# Altium PCB High_Power_Board_v2.PcbDoc (part 2 of 3)
Units mm, origin at the board's own origin, x right, y up, seen from the top; angles counter-clockwise.
Board outline 370 x 200 mm, 2 copper layers (Top Layer, Bottom Layer); 309 components, 248 nets, 1084 pads, 8 vias.
Unrouted connection lines stored in the file: 720.
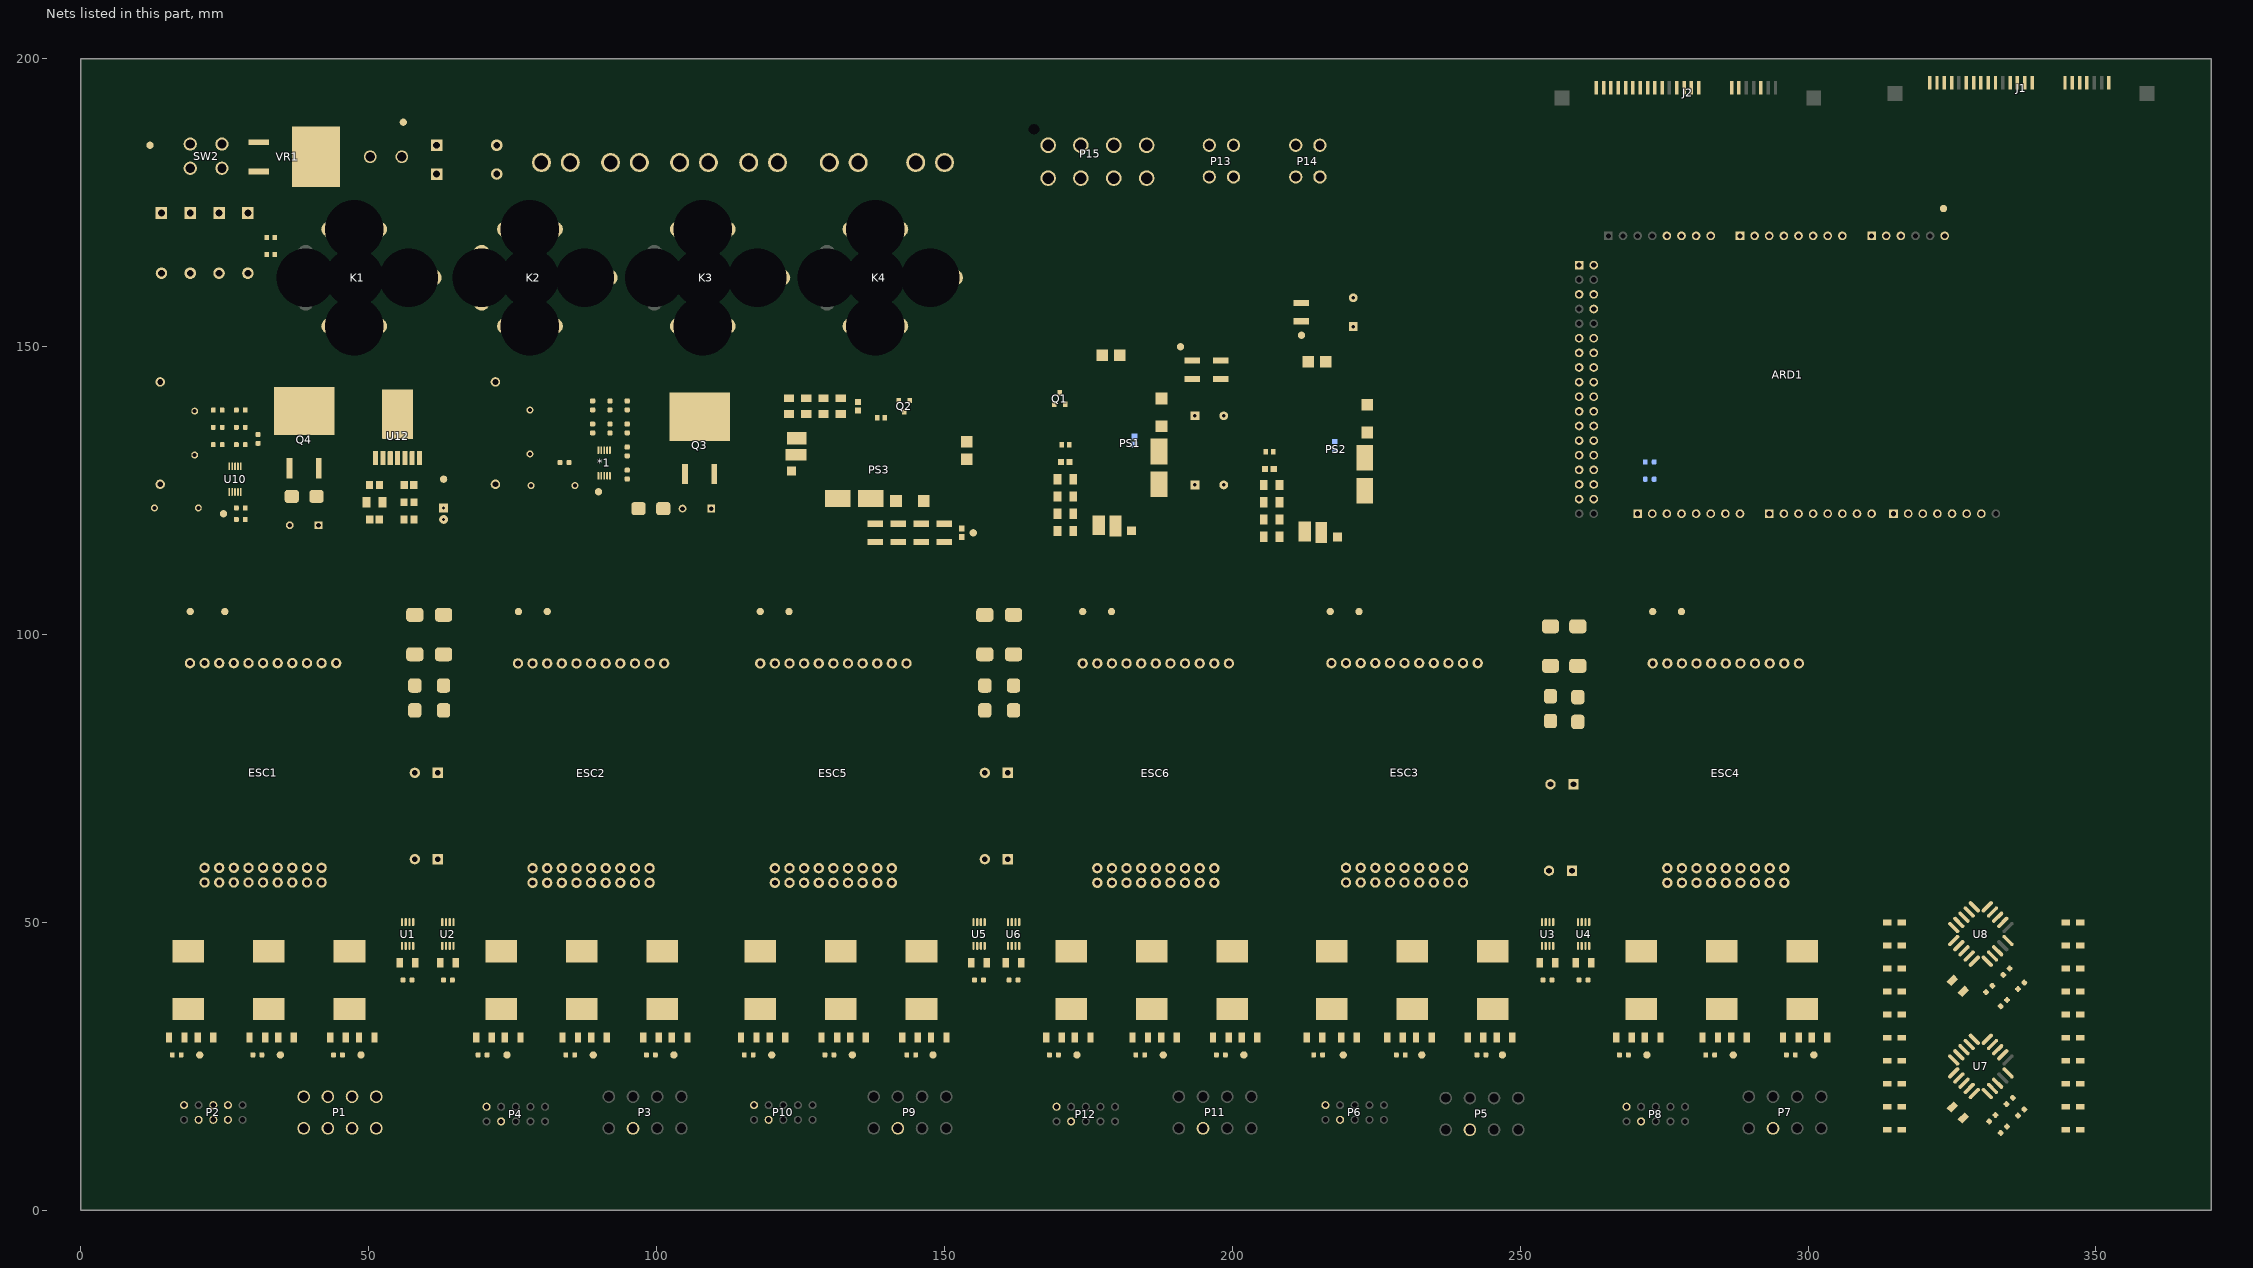
[diagram p2: the nets of this part, all layers, seen from the top]

## Part data
1 2: "Zener Diode", LatestRevisionDate=17-Jul-2002, LatestRevisionNote="Re-released for DXP Platform.", PackageDescription="Diode, Thru-Hole; 2 Leads; 0.7 in Pin Spacing", PackageReference=DIODE-0.7, Published=8-Jun-2000, Publisher="Altium Limited"
*1: "Hot Swap Controller 1-CH 80V N-Channel Positive High Voltage 10-Pin VSSOP T/R", Case/Package=MSOP, Manufacturer 1="TI National Semiconductor", Max Operating Temperature=125°C, Max Supply Voltage=80V, Min Operating Temperature=-40°C, Min Supply Voltage=9V, Output Voltage=12V, Package Quantity=1000, Supplier Part Number 1=LM5069MM-2/NOPBCT-ND, ComponentLink1Description=https://datasheet.ciiva.com/15099/getdatasheetpartid-628880-15099677.pdf?src-supplier=Verical, ComponentLink1URL=https://datasheet.ciiva.com/15099/getdatasheetpartid-628880-15099677.pdf?src-supplier=Verical, ComponentLink2Description=https://datasheet.ciiva.com/3222/lm5069-3222438.pdf?src-supplier=Avnet, ComponentLink2URL=https://datasheet.ciiva.com/3222/lm5069-3222438.pdf?src-supplier=Avnet, ComponentLink3Description=https://datasheet.ciiva.com/3222/lm5069-3222470.pdf?src-supplier=Avnet, ComponentLink3URL=https://datasheet.ciiva.com/3222/lm5069-3222470.pdf?src-supplier=Avnet, ComponentLink4Description=https://datasheet.ciiva.com/6609/lm5069-6609670.pdf?src-supplier=Digi-Key, ComponentLink4URL=https://datasheet.ciiva.com/6609/lm5069-6609670.pdf?src-supplier=Digi-Key, ComponentLink5Description=https://datasheet.ciiva.com/1511/1642228-1511437.pdf?src-supplier=Element14, ComponentLink5URL=https://datasheet.ciiva.com/1511/1642228-1511437.pdf?src-supplier=Element14, Depth=3.1mm, Height=0.86mm, Lead Free="Lead Free", Length=3mm, Manufacturer Part Number 1=LM5069MM-2/NOPB, Mount="Surface Mount", Number of Channels=1, Number of Outputs=1, Number of Pins=10, Packaging="Tape and Reel", Pricing 1="1=3.00000, 10=2.69700, 25=2.54920, 100=2.09610, 250=1.88080, 500=1.81280 (USD)", Radiation Hardening=No, REACH SVHC="No SVHC", RoHS=Yes, Stock 1=115715, Supplier 1=Digi-Key, Width=3mm
B1 D1 D2 D3 D4 D5 D6: "TVS Diode", Code_JEDEC=DO-214-AB, LatestRevisionDate=17-Jul-2002, LatestRevisionNote="Re-released for DXP Platform.", PackageDescription="DO-214-AB/SMC; 2 C-Bend Leads; Body 7.9 x 5.9 mm, inc. leads (LxW)", PackageReference=SMC, PackageVersion=Sep-1996, Published=8-Jun-2000, Publisher="Altium Limited"
B2: library part "D Zener", "Zener Diode", Code_JEDEC=DO-214-AB, LatestRevisionDate=17-Jul-2002, LatestRevisionNote="Re-released for DXP Platform.", PackageDescription="DO-214-AB/SMC; 2 C-Bend Leads; Body 7.9 x 5.9 mm, inc. leads (LxW)", PackageReference=SMC, PackageVersion=Sep-1996, Published=8-Jun-2000, Publisher="Altium Limited"
C1 C9 C17 C25 C33 C41: "Polarized Capacitor (Radial)"
C2 C3 C4 C5 C6 C7 C8 C10 C11 C12 C13 C14 C15 C16 C18 C19 C20 C21 C22 C23 C24 C26 C27 C28 C29 C30 C31 C32 C34 C35 C36 C37 C38 C39 C40 C42 C43 C44 C45 C46 C47 C48 C49 C50: "Capacitor (Semiconductor SIM Model)", LatestRevisionDate=29-May-2009, LatestRevisionNote="IPC-7351 Footprint Added.", PackageDescription="Chip Capacitor", PackageReference=C1206, Published=8-Jun-2000, Publisher="Altium Limited"
C51 C52 C83 C84 C85 C86: "Capacitor", Publisher="Altium Limited"
  C51 C52 C84 C86: LatestRevisionDate=17-Jul-2002, LatestRevisionNote="Re-released for DXP Platform.", PackageDescription="Radial Cap, Thru-Hole; 2 Leads; 0.3 in Pin Spacing", PackageReference=RAD-0.3, Published=8-Jun-2000
  C83 C85: PackageDescription="Capacitor; 2 Leads", PackageReference=CAPR5-4X5, Published=23-Sep-2002
C53 C54 C62: library part 35ZLH330MEFCT810X12.5, "CAP ALUM 330UF 20% 35V RADIAL", Case/Package=Radial, Manufacturer 1=Rubycon, Max Operating Temperature=105°C, Min Operating Temperature=-40°C, Package Quantity=1000, Ripple Current=731.5mA, Supplier Part Number 1=1189-3752-1-ND, Tolerance=20%, Voltage Rating=35V, Capacitance=330uF, ComponentLink1Description=http://www.rubycon.co.jp/en/catalog/e_pdfs/aluminum/e_ZLH.pdf?src-supplier=Digi-Key, ComponentLink1URL=http://www.rubycon.co.jp/en/catalog/e_pdfs/aluminum/e_ZLH.pdf?src-supplier=Digi-Key, ComponentLink2Description=http://www.rubycon.co.jp/en/catalog/e_pdfs/aluminum/Radial_Lead_Alumi_Eng.pdf?src-supplier=Digi-Key, ComponentLink2URL=http://www.rubycon.co.jp/en/catalog/e_pdfs/aluminum/Radial_Lead_Alumi_Eng.pdf?src-supplier=Digi-Key, Height - Seated (Max)=0.551inch, Impedance=39mR, Lead Pitch=0.197inch, Life (Hours)=10000Hour, Manufacturer Part Number 1=35ZLH330MEFCT810X12.5, Mount="Through Hole", Packaging="Tape and Reel", Pricing 1="1=0,52000, 10=0,36900, 100=0,24280 (USD)", RoHS=Yes, Stock 1=14330, Supplier 1=Digi-Key
C55 C56 C63: library part GRM32ER71E226KE15L, "Cap Ceramic 22uF 25V X7R 10% SMD 1210 125C Embossed T/R", Case Code (Imperial)=1210, Case Code (Metric)=3225, Dielectric=X7R, Manufacturer 1=Murata, Max Operating Temperature=125°C, Min Operating Temperature=-55°C, Package Quantity=1, Supplier Part Number 1=490-5313-6-ND, Tolerance=10%, Voltage=25V, Capacitance=22uF, Case/Package=1210, Category=Capacitor, ComponentLink1Description=https://datasheet.ciiva.com/6072/1697714-6072768.pdf?src-supplier=Farnell, ComponentLink1URL=https://datasheet.ciiva.com/6072/1697714-6072768.pdf?src-supplier=Farnell, ComponentLink2Description=https://datasheet.ciiva.com/16497/product-16497009.pdf?src-supplier=Future+Electronics, ComponentLink2URL=https://datasheet.ciiva.com/16497/product-16497009.pdf?src-supplier=Future+Electronics, ComponentLink3Description=https://datasheet.ciiva.com/3776/2741grm32er71e226ke1523-3776996.pdf?src-supplier=Arrow, ComponentLink3URL=https://datasheet.ciiva.com/3776/2741grm32er71e226ke1523-3776996.pdf?src-supplier=Arrow, ComponentLink4Description=https://datasheet.ciiva.com/11789/0900766b80ef921d-11789129.pdf?src-supplier=RSComponents, ComponentLink4URL=https://datasheet.ciiva.com/11789/0900766b80ef921d-11789129.pdf?src-supplier=RSComponents, ComponentLink5Description=https://datasheet.ciiva.com/29201/451826-da-01-de-vs-kondens-grm32-er71e-226ke15l-29201795.pdf?src-supplier=Conrad, ComponentLink5URL=https://datasheet.ciiva.com/29201/451826-da-01-de-vs-kondens-grm32-er71e-226ke15l-29201795.pdf?src-supplier=Conrad, ComponentLink6Description=https://datasheet.ciiva.com/175/partnumbering-e-01-175746.pdf?src-supplier=Digi-Key, ComponentLink6URL=https://datasheet.ciiva.com/175/partnumbering-e-01-175746.pdf?src-supplier=Digi-Key, ComponentLink7Description=https://datasheet.ciiva.com/175/partnumbering-e-01-175747.pdf?src-supplier=Digi-Key, ComponentLink7URL=https://datasheet.ciiva.com/175/partnumbering-e-01-175747.pdf?src-supplier=Digi-Key, ComponentLink8Description=https://datasheet.ciiva.com/175/partnumbering-e-01-175748.pdf?src-supplier=Digi-Key, ComponentLink8URL=https://datasheet.ciiva.com/175/partnumbering-e-01-175748.pdf?src-supplier=Digi-Key, ComponentLink9Description=https://datasheet.ciiva.com/22703/1697714-22703397.pdf?src-supplier=Element14, ComponentLink9URL=https://datasheet.ciiva.com/22703/1697714-22703397.pdf?src-supplier=Element14, Depth=2.5mm, Height=2.5mm, Lead Free="Lead Free", Length=3.2mm, Manufacturer Part Number 1=GRM32ER71E226KE15L, Material=Ceramic, Mount="Surface Mount", Number of Pins=2, Packaging="Tape and Reel", Pricing 1="1=1,78000, 10=1,40600, 100=1,05410, 500=0,79646 (USD)", Radiation Hardening=No, REACH SVHC="No SVHC", RoHS=Yes, Stock 1=52660, Supplier 1=Digi-Key, Termination=SMD/SMT, Thickness=0.106inch, Voltage Rating=25V, Voltage Rating (DC)=25V, Width=0.098inch
C57 C58 C59 C60 C64 C65 C66 C67 C74 C76 C82: library part GRT31CR61H106ME01L, "CAP CER 10UF 50V X5R 1206", Capacitance=10uF, Case Code (Imperial)=1206, Case Code (Metric)=3216, Manufacturer 1=Murata, Max Operating Temperature=85°C, Min Operating Temperature=-55°C, Ratings=AEC-Q200, Supplier Part Number 1=490-12457-1-ND, Tolerance=20%, Voltage Rating=50V, Case/Package=1206, Category=Capacitor, ComponentLink1Description=http://search.murata.co.jp/Ceramy/image/img/A01X/G101/ENG/GRT31CR61H106ME01-01.pdf?src-supplier=Digi-Key, ComponentLink1URL=http://search.murata.co.jp/Ceramy/image/img/A01X/G101/ENG/GRT31CR61H106ME01-01.pdf?src-supplier=Digi-Key, Length=0.126inch, Manufacturer Part Number 1=GRT31CR61H106ME01L, Mount="Surface Mount", Packaging="Tape and Reel", Pricing 1="1=0,50000, 10=0,34900, 100=0,20920, 500=0,15690, 1000=0,13249 (USD)", RoHS=Yes, Stock 1=8159, Supplier 1=Digi-Key, Thickness=0.071inch, Width=0.063inch
C61 C68 C77 C78: library part C0603C103KARACAUTO, "Cap Ceramic 0.01uF 250V X7R 10% Pad SMD 0603 125C Automotive T/R", Capacitance=10nF, Case Code (Imperial)=0603, Case Code (Metric)=1608, Manufacturer 1=KEMET, Max Operating Temperature=125°C, Min Operating Temperature=-55°C, Ratings=AEC-Q200, Supplier Part Number 1=399-17960-1-ND, Tolerance=10%, Voltage Rating=250V, Case/Package=0603, Category=Capacitor, ComponentLink1Description=https://api.kemet.com/component-edge/download/datasheet/C0603C103KARACAUTO.pdf?src-supplier=Digi-Key, ComponentLink1URL=https://api.kemet.com/component-edge/download/datasheet/C0603C103KARACAUTO.pdf?src-supplier=Digi-Key, Manufacturer Part Number 1=C0603C103KARACAUTO, Mount="Surface Mount", Packaging="Tape and Reel", Pricing 1="1=0,90000, 10=0,68500, 100=0,49040, 500=0,37964, 1000=0,32691 (USD)", RoHS=No, Stock 1=8483, Supplier 1=Digi-Key
C69 C70: library part "Wurth 860010372006", "Polarized Capacitor (Radial)", Case Code (Imperial)=1210, Case Code (Metric)=3225, Dielectric=X7R, Manufacturer 1=Murata, Manufacturer Part Number 1=GRM32ER71E226KE15L, Max Operating Temperature=125°C, Min Operating Temperature=-55°C, Package Quantity=1, Supplier Part Number 1=490-5313-6-ND, Tolerance=10%, Voltage=25V, Capacitance=22uF, Case/Package=1210, Category=Capacitor, ComponentLink1Description=https://datasheet.ciiva.com/6072/1697714-6072768.pdf?src-supplier=Farnell, ComponentLink1URL=https://datasheet.ciiva.com/6072/1697714-6072768.pdf?src-supplier=Farnell, ComponentLink2Description=https://datasheet.ciiva.com/16497/product-16497009.pdf?src-supplier=Future+Electronics, ComponentLink2URL=https://datasheet.ciiva.com/16497/product-16497009.pdf?src-supplier=Future+Electronics, ComponentLink3Description=https://datasheet.ciiva.com/3776/2741grm32er71e226ke1523-3776996.pdf?src-supplier=Arrow, ComponentLink3URL=https://datasheet.ciiva.com/3776/2741grm32er71e226ke1523-3776996.pdf?src-supplier=Arrow, ComponentLink4Description=https://datasheet.ciiva.com/11789/0900766b80ef921d-11789129.pdf?src-supplier=RSComponents, ComponentLink4URL=https://datasheet.ciiva.com/11789/0900766b80ef921d-11789129.pdf?src-supplier=RSComponents, ComponentLink5Description=https://datasheet.ciiva.com/29201/451826-da-01-de-vs-kondens-grm32-er71e-226ke15l-29201795.pdf?src-supplier=Conrad, ComponentLink5URL=https://datasheet.ciiva.com/29201/451826-da-01-de-vs-kondens-grm32-er71e-226ke15l-29201795.pdf?src-supplier=Conrad, ComponentLink6Description=https://datasheet.ciiva.com/175/partnumbering-e-01-175746.pdf?src-supplier=Digi-Key, ComponentLink6URL=https://datasheet.ciiva.com/175/partnumbering-e-01-175746.pdf?src-supplier=Digi-Key, ComponentLink7Description=https://datasheet.ciiva.com/175/partnumbering-e-01-175747.pdf?src-supplier=Digi-Key, ComponentLink7URL=https://datasheet.ciiva.com/175/partnumbering-e-01-175747.pdf?src-supplier=Digi-Key, ComponentLink8Description=https://datasheet.ciiva.com/175/partnumbering-e-01-175748.pdf?src-supplier=Digi-Key, ComponentLink8URL=https://datasheet.ciiva.com/175/partnumbering-e-01-175748.pdf?src-supplier=Digi-Key, ComponentLink9Description=https://datasheet.ciiva.com/22703/1697714-22703397.pdf?src-supplier=Element14, ComponentLink9URL=https://datasheet.ciiva.com/22703/1697714-22703397.pdf?src-supplier=Element14, Depth=2.5mm, Height=2.5mm, Lead Free="Lead Free", Length=3.2mm, Material=Ceramic, Mount="Surface Mount", Number of Pins=2, Packaging="Tape and Reel", Pricing 1="1=1,78000, 10=1,40600, 100=1,05410, 500=0,79646 (USD)", Radiation Hardening=No, REACH SVHC="No SVHC", RoHS=Yes, Stock 1=52660, Supplier 1=Digi-Key, Termination=SMD/SMT, Thickness=0.106inch, Voltage Rating=25V, Voltage Rating (DC)=25V, Width=0.098inch
C71: library part Cap2, "Capacitor", Case Code (Imperial)=1210, Case Code (Metric)=3225, Dielectric=X7R, Manufacturer 1=Murata, Manufacturer Part Number 1=GRM32ER71E226KE15L, Max Operating Temperature=125°C, Min Operating Temperature=-55°C, Package Quantity=1, Supplier Part Number 1=490-5313-6-ND, Tolerance=10%, Voltage=25V, Capacitance=22uF, Case/Package=1210, Category=Capacitor, ComponentLink1Description=https://datasheet.ciiva.com/6072/1697714-6072768.pdf?src-supplier=Farnell, ComponentLink1URL=https://datasheet.ciiva.com/6072/1697714-6072768.pdf?src-supplier=Farnell, ComponentLink2Description=https://datasheet.ciiva.com/16497/product-16497009.pdf?src-supplier=Future+Electronics, ComponentLink2URL=https://datasheet.ciiva.com/16497/product-16497009.pdf?src-supplier=Future+Electronics, ComponentLink3Description=https://datasheet.ciiva.com/3776/2741grm32er71e226ke1523-3776996.pdf?src-supplier=Arrow, ComponentLink3URL=https://datasheet.ciiva.com/3776/2741grm32er71e226ke1523-3776996.pdf?src-supplier=Arrow, ComponentLink4Description=https://datasheet.ciiva.com/11789/0900766b80ef921d-11789129.pdf?src-supplier=RSComponents, ComponentLink4URL=https://datasheet.ciiva.com/11789/0900766b80ef921d-11789129.pdf?src-supplier=RSComponents, ComponentLink5Description=https://datasheet.ciiva.com/29201/451826-da-01-de-vs-kondens-grm32-er71e-226ke15l-29201795.pdf?src-supplier=Conrad, ComponentLink5URL=https://datasheet.ciiva.com/29201/451826-da-01-de-vs-kondens-grm32-er71e-226ke15l-29201795.pdf?src-supplier=Conrad, ComponentLink6Description=https://datasheet.ciiva.com/175/partnumbering-e-01-175746.pdf?src-supplier=Digi-Key, ComponentLink6URL=https://datasheet.ciiva.com/175/partnumbering-e-01-175746.pdf?src-supplier=Digi-Key, ComponentLink7Description=https://datasheet.ciiva.com/175/partnumbering-e-01-175747.pdf?src-supplier=Digi-Key, ComponentLink7URL=https://datasheet.ciiva.com/175/partnumbering-e-01-175747.pdf?src-supplier=Digi-Key, ComponentLink8Description=https://datasheet.ciiva.com/175/partnumbering-e-01-175748.pdf?src-supplier=Digi-Key, ComponentLink8URL=https://datasheet.ciiva.com/175/partnumbering-e-01-175748.pdf?src-supplier=Digi-Key, ComponentLink9Description=https://datasheet.ciiva.com/22703/1697714-22703397.pdf?src-supplier=Element14, ComponentLink9URL=https://datasheet.ciiva.com/22703/1697714-22703397.pdf?src-supplier=Element14, Depth=2.5mm, Height=2.5mm, Lead Free="Lead Free", Length=3.2mm, Material=Ceramic, Mount="Surface Mount", Number of Pins=2, Packaging="Tape and Reel", Pricing 1="1=1,78000, 10=1,40600, 100=1,05410, 500=0,79646 (USD)", Radiation Hardening=No, REACH SVHC="No SVHC", RoHS=Yes, Stock 1=52660, Supplier 1=Digi-Key, Termination=SMD/SMT, Thickness=0.106inch, Voltage Rating=25V, Voltage Rating (DC)=25V, Width=0.098inch
C72: library part Cap, "Capacitor", Case Code (Imperial)=1210, Case Code (Metric)=3225, Dielectric=X7R, Manufacturer 1=Murata, Manufacturer Part Number 1=GRM32ER71E226KE15L, Max Operating Temperature=125°C, Min Operating Temperature=-55°C, Package Quantity=1, Supplier Part Number 1=490-5313-6-ND, Tolerance=10%, Voltage=25V, Capacitance=22uF, Case/Package=1210, Category=Capacitor, ComponentLink1Description=https://datasheet.ciiva.com/6072/1697714-6072768.pdf?src-supplier=Farnell, ComponentLink1URL=https://datasheet.ciiva.com/6072/1697714-6072768.pdf?src-supplier=Farnell, ComponentLink2Description=https://datasheet.ciiva.com/16497/product-16497009.pdf?src-supplier=Future+Electronics, ComponentLink2URL=https://datasheet.ciiva.com/16497/product-16497009.pdf?src-supplier=Future+Electronics, ComponentLink3Description=https://datasheet.ciiva.com/3776/2741grm32er71e226ke1523-3776996.pdf?src-supplier=Arrow, ComponentLink3URL=https://datasheet.ciiva.com/3776/2741grm32er71e226ke1523-3776996.pdf?src-supplier=Arrow, ComponentLink4Description=https://datasheet.ciiva.com/11789/0900766b80ef921d-11789129.pdf?src-supplier=RSComponents, ComponentLink4URL=https://datasheet.ciiva.com/11789/0900766b80ef921d-11789129.pdf?src-supplier=RSComponents, ComponentLink5Description=https://datasheet.ciiva.com/29201/451826-da-01-de-vs-kondens-grm32-er71e-226ke15l-29201795.pdf?src-supplier=Conrad, ComponentLink5URL=https://datasheet.ciiva.com/29201/451826-da-01-de-vs-kondens-grm32-er71e-226ke15l-29201795.pdf?src-supplier=Conrad, ComponentLink6Description=https://datasheet.ciiva.com/175/partnumbering-e-01-175746.pdf?src-supplier=Digi-Key, ComponentLink6URL=https://datasheet.ciiva.com/175/partnumbering-e-01-175746.pdf?src-supplier=Digi-Key, ComponentLink7Description=https://datasheet.ciiva.com/175/partnumbering-e-01-175747.pdf?src-supplier=Digi-Key, ComponentLink7URL=https://datasheet.ciiva.com/175/partnumbering-e-01-175747.pdf?src-supplier=Digi-Key, ComponentLink8Description=https://datasheet.ciiva.com/175/partnumbering-e-01-175748.pdf?src-supplier=Digi-Key, ComponentLink8URL=https://datasheet.ciiva.com/175/partnumbering-e-01-175748.pdf?src-supplier=Digi-Key, ComponentLink9Description=https://datasheet.ciiva.com/22703/1697714-22703397.pdf?src-supplier=Element14, ComponentLink9URL=https://datasheet.ciiva.com/22703/1697714-22703397.pdf?src-supplier=Element14, Depth=2.5mm, Height=2.5mm, Lead Free="Lead Free", Length=3.2mm, Material=Ceramic, Mount="Surface Mount", Number of Pins=2, Packaging="Tape and Reel", Pricing 1="1=1,78000, 10=1,40600, 100=1,05410, 500=0,79646 (USD)", Radiation Hardening=No, REACH SVHC="No SVHC", RoHS=Yes, Stock 1=52660, Supplier 1=Digi-Key, Termination=SMD/SMT, Thickness=0.106inch, Voltage Rating=25V, Voltage Rating (DC)=25V, Width=0.098inch
C73 C75: library part Cap, "Capacitor", Capacitance=10uF, Case Code (Imperial)=1206, Case Code (Metric)=3216, Manufacturer 1=Murata, Manufacturer Part Number 1=GRT31CR61H106ME01L, Max Operating Temperature=85°C, Min Operating Temperature=-55°C, Ratings=AEC-Q200, Supplier Part Number 1=490-12457-1-ND, Tolerance=20%, Voltage Rating=50V, Case/Package=1206, Category=Capacitor, ComponentLink1Description=http://search.murata.co.jp/Ceramy/image/img/A01X/G101/ENG/GRT31CR61H106ME01-01.pdf?src-supplier=Digi-Key, ComponentLink1URL=http://search.murata.co.jp/Ceramy/image/img/A01X/G101/ENG/GRT31CR61H106ME01-01.pdf?src-supplier=Digi-Key, Length=0.126inch, Mount="Surface Mount", Packaging="Tape and Reel", Pricing 1="1=0,50000, 10=0,34900, 100=0,20920, 500=0,15690, 1000=0,13249 (USD)", RoHS=Yes, Stock 1=8159, Supplier 1=Digi-Key, Thickness=0.071inch, Width=0.063inch
C79: library part "0.022uF C0805C223K5RACTU", "KEMET - C0805C223K5RACTU - CAP, MLCC, X7R, 22NF, 50V, 0805", Capacitance=22nF, Case/Package=0805, Dielectric=X7R, Dielectric Material=Ceramic, Manufacturer 1=KEMET, Manufacturer Part Number 1=C0805C223K5RACTU, Max Operating Temperature=125°C, Min Operating Temperature=-55°C, Supplier Part Number 1=399-1163-1-ND, Tolerance=10%, Voltage=50V, ComponentLink1Description=https://datasheet.ciiva.com/18193/getdatasheetpartid-385695-18193669.pdf?src-supplier=Verical, ComponentLink1URL=https://datasheet.ciiva.com/18193/getdatasheetpartid-385695-18193669.pdf?src-supplier=Verical, Depth=1.25mm, Height=0.78mm, Length=2mm, Mount="Surface Mount", Packaging="Tape and Reel", Pricing 1="1=0,10000, 10=0,06000, 100=0,02670, 500=0,01906, 1000=0,01497 (USD)", Radiation Hardening=No, RoHS=Yes, Stock 1=516153, Supplier 1=Digi-Key, Voltage Rating (DC)=50V
C80: library part "33uF UFW1H330MDD1TD", "CAP ALUM 33UF 20% 50V RADIAL", Case/Package=Radial, Manufacturer 1=Nichicon, Manufacturer Part Number 1=UFW1H330MDD1TD, Max Operating Temperature=85°C, Min Operating Temperature=-40°C, Package Quantity=1, Ripple Current=120mA, Supplier Part Number 1=493-11010-1-ND, Tolerance=20%, Voltage Rating=50V, Capacitance=33uF, ComponentLink1Description=http://nichicon-us.com/english/products/pdfs/e-ufw.pdf?src-supplier=Digi-Key, ComponentLink1URL=http://nichicon-us.com/english/products/pdfs/e-ufw.pdf?src-supplier=Digi-Key, ComponentLink2Description=http://nichicon-us.com/english/products/pdfs/e-mi_tape.pdf?src-supplier=Digi-Key, ComponentLink2URL=http://nichicon-us.com/english/products/pdfs/e-mi_tape.pdf?src-supplier=Digi-Key, Height - Seated (Max)=0.492inch, Lead Pitch=0.079inch, Life (Hours)=2000Hour, Mount="Through Hole", Packaging="Tape and Reel", Pricing 1="1=0,23000, 10=0,16000, 100=0,09070, 500=0,06404, 1000=0,05603 (USD)", RoHS=Yes, Stock 1=4144, Supplier 1=Digi-Key
C81: library part "4700pF 0805", "KEMET - C0805C472K5RACTU - CERAMIC CAPACITOR 4700PF, 50V, X7R, 10%, 0805", Capacitance=4.7nF, Case Code (Imperial)=0805, Case Code (Metric)=2012, Dielectric=X7R, Dielectric Material=Ceramic, Manufacturer 1=KEMET, Manufacturer Part Number 1=C0805C472K5RACTU, Max Operating Temperature=125°C, Min Operating Temperature=-55°C, Package Quantity=1, Supplier Part Number 1=399-1155-1-ND, Tolerance=10%, Voltage=50V, Case/Package=0805, ComponentLink1Description=https://datasheet.ciiva.com/6074/kem-c1002-x7r-smd-6074679.pdf?src-supplier=Farnell, ComponentLink1URL=https://datasheet.ciiva.com/6074/kem-c1002-x7r-smd-6074679.pdf?src-supplier=Farnell, ComponentLink2Description=https://datasheet.ciiva.com/28682/1851736-28682318.pdf?src-supplier=Element14, ComponentLink2URL=https://datasheet.ciiva.com/28682/1851736-28682318.pdf?src-supplier=Element14, Contact Plating=Tin,Matte, Depth=1.25mm, Height=0.78mm, Length=2mm, Mount="Surface Mount", Number of Pins=2, Packaging="Tape and Reel", Pricing 1="1=0,10000, 10=0,06800, 100=0,03040, 500=0,02172, 1000=0,01706 (USD)", Radiation Hardening=No, REACH SVHC="No SVHC", RoHS=Yes, Stock 1=374666, Supplier 1=Digi-Key, Termination=SMD/SMT, Thickness=0.035inch, Voltage Rating=50V, Voltage Rating (DC)=50V, Weight=0.000194oz, Width=0.049inch
Cin1 Cin2: library part Cap, "Capacitor", LatestRevisionDate=17-Jul-2002, LatestRevisionNote="Re-released for DXP Platform.", PackageDescription="Radial Cap, Thru-Hole; 2 Leads; 0.3 in Pin Spacing", PackageReference=RAD-0.3, Published=8-Jun-2000, Publisher="Altium Limited"
D7 D8 D9 D10 D11 D12: "1 Amp General Purpose Rectifier", Code_JEDEC=DO-204-AL, ComponentLink1Description="Manufacturer Link", ComponentLink1URL=http://www.fairchildsemi.com/, ComponentLink2Description=Datasheet, ComponentLink2URL=http://www.fairchildsemi.com/ds/1N%2F1N4001.pdf, DatasheetVersion=1998, LatestRevisionDate=17-Jul-2002, LatestRevisionNote="Re-released for DXP Platform.", PackageDescription="Diode, Axial; Body 5.2 x 2.7 mm (LxDia. max), Lead Dia. 0.86 mm (max)", PackageReference=DO-41, PackageVersion=Aug-1999, Published=8-Jun-2000, Publisher="Altium Limited"
DS1 DS2 DS3 DS4 DS5 DS6 DS7 DS8 DS9 DS10 DS11 DS12 DS13 DS14 DS15 DS16 DS17 DS18 DS19 DS20: library part CMP-2000-06628-1, "LED Green, 75 mW, 30 mA, -30 to 85 degC, 2-Pin SMD, RoHS, Tape and Reel", Emitting Color=YellowGreen, Forward Current=30mA, Forward Voltage=2.4V, Manufacturer=Lite-On, Operating Temp Range=-55Cto85C, Operating Temperature Classification=Industrial, Package Description="2-Pin Surface Mount Device, Body 2.15 x 0.6 mm", Package Reference=S220KGKT, Package Type=ChipLed, Power Dissipation=75W, Reverse Voltage=5V, Test Current (It)=20mA, Chip Material=AlGaInP, Datasheet URL=http://optoelectronics.liteon.com/upload/download/DS22-2000-075/S_110_LTST-S220KGKT.pdf, Datasheet Version="Rev. D, 12/2013", DELETED=Compliant, Dominant Wave Length=571nm, High Brightness=Yes, Lens Dimensions=1.7x0.6x0.5mm, Lum Intensity=35mcd, Luminous Intensity=35mcd, Main Category=ChipLED, Manufacturer URL=http://www.us.liteon.com/, Mounting=SurfaceMount, Mounting Technology=SurfaceMount, Number of  Elements=1, Packaging=TapeandReel, Peak Wavelength=574nm, Pin Count=2, Product Depth (mm)=0.6mm, Product Height (mm)=1mm, Product Length (mm)=2.1mm, Rad Hardened=No, Shape Type=Rectangular, Type=Uni-Color, Viewing Angle=130deg
ESC1 ESC2 ESC3 ESC4 ESC5 ESC6: "ESCON Module 50/8 HE Servocontroller"
F1 F2 F3 F4 F5 F6: "Fuse", LatestRevisionDate=17-Jul-2002, LatestRevisionNote="Re-released for DXP Platform.", PackageDescription="Thru-Hole; 2 Leads", PackageReference=PIN-W2/E2.8, Published=8-Jun-2000, Publisher="Altium Limited"
J1: "SATA connector.  / Connector 1 for option 1 as per Spec", Supplier 1=Digi-Key
J2: "SATA connector.  / Connector 2 for option 1 as per Spec", Supplier 1=Digi-Key
K1 K2 K3 K4: "SPDT Relay", LatestRevisionDate=17-Jul-2002, LatestRevisionNote="Re-released for DXP Platform.", PackageReference=MODULE5B, Published=8-Jun-2000, Publisher="Altium Limited"
L1 L2 L3 L4 L5 L6 L7 L8 L9 L10 L11 L12 L13 L14 L15 L16 L17 L18: "4.7µH Shielded Wirewound Inductor 8.25A 9.17mOhm Nonstandard", Code_IEC=1005, Code_JEITA=0402, LatestRevisionDate=29-May-2009, LatestRevisionNote="IPC-7351 Footprint Added.", PackageDescription="Chip Inductor", PackageReference=0402-A, Published=8-Jun-2000, Publisher="Altium Limited"
P1 P3 P5 P7 P9 P11: library part "Molex Mini-Fit Jr 8pos Vert", "Mini-Fit Jr, 8 pos 2 row"
P2 P4 P6 P8 P10 P12: "IDC, 10 pos, Male"
P13 P14: library part "Molex 0039281043", "Mini-Fit Jr. Header, Dual Row, Right-Angle, with Snap-in Plastic Peg PCB Lock, 6 Circuits, PA Polyamide Nylon 6/6 94V-2, 0.76µm Select Gold (Au) Plating"
P15: library part "Molex Mega-Fit 8pos Vert", "Mega-Fit, 8 pos 2 row"
PS1 PS2 PS3: "Power Supply", Manufacturer_Name=ABB, Mouser Part Number=894-APXW012A0X3-SRZ, Datasheet Link=https://datasheet.datasheetarchive.com/originals/distributors/Datasheets_SAMA/683ccf345f63793608341fe806dd9fff.pdf, Height=10mm, Manufacturer_Part_Number=APXW012A0X3-SRZ, Mouser Price/Stock=https://www.mouser.co.uk/ProductDetail/ABB/APXW012A0X3-SRZ?qs=R2DZpqZpp70Xpp2aKRKJXQ%3D%3D
Q1 Q2: library part PSMN4R8-100BSEJ, "N-Channel MOSFET", Case/Package=SOT-23, Continuous Drain Current (ID)=115mA, Drain to Source Breakdown Voltage=70V, Drain to Source Resistance=7.5R, Drain to Source Voltage (Vdss)=60V, Gate to Source Voltage (Vgs)=20V, Input Capacitance=50pF, Max Operating Temperature=150°C, Max Power Dissipation=300mW, Min Operating Temperature=-55°C, Package Quantity=3000, Power Dissipation=540mW, Threshold Voltage=2.5V, Contact Plating=Tin, Current Rating=115mA, Dual Supply Voltage=60V, Element Configuration=Single, Fall Time=5.6ns, Height=1mm, Lead Free="Lead Free", Length=2.9mm, Mount="Surface Mount", Nominal Vgs=2.5V, Number of Channels=1, Number of Elements=1, Number of Pins=3, On-State Resistance=7.5R, Packaging="Tape and Reel", Radiation Hardening=No, Rds On Max=7.5R, REACH SVHC="No SVHC", Rise Time=3ns, Termination=SMD/SMT, Turn-Off Delay Time=11ns, Turn-On Delay Time=7ns, Voltage=60V, Voltage Rating (DC)=60V, Weight=0.000282oz, Width=1.3mm
Q3: "N-Channel MOSFET", Supplier Part Number 1=1727-1103-1-ND, LatestRevisionDate=17-Jul-2002, LatestRevisionNote="Re-released for DXP Platform.", PackageDescription="TO, Flat Index; 3 In-Line, Axial Leads; Body Dia. 4.6mm; Lead Dia. 0.5 mm (max)", PackageReference=E3, PackageVersion=1995/1996, Published=8-Jun-2000, Publisher="Altium Limited", Supplier 1=Digi-Key
Q4: library part CMP-1048-00557-1, "High Voltage Transistor, PNP Silicon, 3-Pin SOT-23, Pb-Free, Tape and Reel", Supplier Part Number 1=1727-1103-1-ND, LatestRevisionDate=17-Jul-2002, LatestRevisionNote="Re-released for DXP Platform.", PackageDescription="TO, Flat Index; 3 In-Line, Axial Leads; Body Dia. 4.6mm; Lead Dia. 0.5 mm (max)", PackageReference=E3, PackageVersion=1995/1996, Published=8-Jun-2000, Publisher="Altium Limited", Supplier 1=Digi-Key
R1 R2 R3 R4 R5 R6 R7 R8 R9 R10 R11 R12 R13 R14 R15 R16 R17 R18 R19 R20 R21 R22 R23 R24 R25 R26 R27 R28 R29 R30 R31 R32 R33 R34: "Resistor", LatestRevisionDate=17-Jul-2002, LatestRevisionNote="Re-released for DXP Platform.", PackageDescription="Axial Device, Thru-Hole; 2 Leads; 0.3 in Pin Spacing", PackageReference=AXIAL-0.3, Published=8-Jun-2000, Publisher="Altium Limited"
R35: library part CMP-2000-03816-5, "Chip Resistor, 0 Ohm, Jumper, 100 mW, -55 to 155 degC, 0603 (1608 Metric), RoHS, Tape and Reel", Manufacturer="Vishay Semiconductor", Max Operating Temperature="155 degC", Min Operating Temperature="-55 degC", Package Quantity=5000, Voltage Rating="75 V", ComponentLink1Description="Manufacturer URL", ComponentLink1URL=http://www.vishay.com/, ComponentLink2Description=Datasheet, ComponentLink2URL=http://www.vishay.com/docs/20035/dcrcwe3.pdf, DatasheetVersion=06/2012, Height="0.45 mm", Length="1.55 mm", Mount="Surface Mount", Mounting Technology="Surface Mount", PackageDescription="2-Pin Surface Mount Device, Body 1.575 x 0.85 mm", PackageReference=0603, Packaging="Tape and Reel", Pins=2, REACH SVHC=Unknown, RoHSCompliant=true
R36: library part ERA-3AEB2672V, "RES SMD 26.7KOHM 0.1% 1/10W 0603", Case Code (Imperial)=0603, Case Code (Metric)=1608, Manufacturer 1=Panasonic, Max Operating Temperature=155°C, Max Power Dissipation=100mW, Min Operating Temperature=-55°C, Package Quantity=1, Resistance=26.7kR, Supplier Part Number 1=P26.7KDBCT-ND, Temperature Coefficient=25ppm/°C, Tolerance=0.1%, Voltage Rating=75V, Case/Package=0603, ComponentLink1Description=https://datasheet.ciiva.com/11814/0900766b80eb1d8c-11814836.pdf?src-supplier=RSComponents, ComponentLink1URL=https://datasheet.ciiva.com/11814/0900766b80eb1d8c-11814836.pdf?src-supplier=RSComponents, ComponentLink2Description=https://datasheet.ciiva.com/5987/485442-5987192.pdf?src-supplier=Farnell, ComponentLink2URL=https://datasheet.ciiva.com/5987/485442-5987192.pdf?src-supplier=Farnell, ComponentLink3Description=https://datasheet.ciiva.com/5987/485442-5987183.pdf?src-supplier=Farnell, ComponentLink3URL=https://datasheet.ciiva.com/5987/485442-5987183.pdf?src-supplier=Farnell, ComponentLink4Description=https://datasheet.ciiva.com/46422/485442-46422629.pdf?src-supplier=Element14, ComponentLink4URL=https://datasheet.ciiva.com/46422/485442-46422629.pdf?src-supplier=Element14, ComponentLink5Description=https://datasheet.ciiva.com/17210/aoa0000ce26-17210681.pdf?src-supplier=Avnet+Europe, ComponentLink5URL=https://datasheet.ciiva.com/17210/aoa0000ce26-17210681.pdf?src-supplier=Avnet+Europe, Composition="Thin Film,Metal Film", Contact Plating=Tin, Depth=0.8mm, Features="Automotive AEC-Q200", Height=0.45mm, Lead Free="Lead Free", Length=1.6mm, Manufacturer Part Number 1=ERA-3AEB2672V, Mount="Surface Mount", Number of Pins=2, Number of Terminations=2, Packaging="Tape and Reel", Power Rating=100mW, Pricing 1="1=0,35000, 10=0,30000, 100=0,11720, 1000=0,04906, 2500=0,04498 (USD)", Radiation Hardening=No, REACH SVHC="No SVHC", RoHS=Yes, Stock 1=17260, Supplier 1=Digi-Key, Voltage Rating (DC)=75V, Width=0.8mm
R37 R39: library part Res1, "Resistor", Manufacturer="Vishay Semiconductor", Max Operating Temperature="155 degC", Min Operating Temperature="-55 degC", Package Quantity=5000, Voltage Rating="75 V", ComponentLink1Description="Manufacturer URL", ComponentLink1URL=http://www.vishay.com/, ComponentLink2Description=Datasheet, ComponentLink2URL=http://www.vishay.com/docs/20035/dcrcwe3.pdf, DatasheetVersion=06/2012, Height="0.45 mm", Length="1.55 mm", Mount="Surface Mount", Mounting Technology="Surface Mount", PackageDescription="2-Pin Surface Mount Device, Body 1.575 x 0.85 mm", PackageReference=0603, Packaging="Tape and Reel", Pins=2, REACH SVHC=Unknown, RoHSCompliant=true
R38: library part RT0603DRD0716K2L, "RES SMD 16.2KOHM 0.5% 1/10W 0603", Case Code (Imperial)=0603, Case Code (Metric)=1608, Manufacturer 1=Yageo, Max Operating Temperature=155°C, Max Power Dissipation=100mW, Min Operating Temperature=-55°C, Package Quantity=1, Resistance=16.2kR, Supplier Part Number 1=311-16.2KDCT-ND, Temperature Coefficient=25ppm/°C, Tolerance=0.5%, Voltage Rating (DC)=50V, Case/Package=0603, Category=Resistors, ComponentLink1Description=http://www.yageo.com/documents/recent/PYu-RT_1-to-0.01_RoHS_L_8.pdf?src-supplier=Digi-Key, ComponentLink1URL=http://www.yageo.com/documents/recent/PYu-RT_1-to-0.01_RoHS_L_8.pdf?src-supplier=Digi-Key, Composition="Thin Film", Features="Moisture Resistant", Height=0.022inch, Lead Free="Lead Free", Length=0.063inch, Manufacturer Part Number 1=RT0603DRD0716K2L, Number of Terminations=2, Packaging="Tape and Reel", Pricing 1="1=0,20000, 10=0,16800, 100=0,06570, 1000=0,02750, 2500=0,02521 (USD)", RoHS=Yes, Stock 1=8163, Supplier 1=Digi-Key, Width=0.031inch
R40: library part Res1, "Resistor", Case Code (Imperial)=0603, Case Code (Metric)=1608, Manufacturer 1=Panasonic, Manufacturer Part Number 1=ERA3AEB6191V, Max Operating Temperature=155°C, Max Power Dissipation=100mW, Min Operating Temperature=-55°C, Package Quantity=1, Resistance=6.19kR, Supplier Part Number 1=P6.19KDBCT-ND, Temperature Coefficient=25ppm/°C, Tolerance=0.1%, Voltage Rating=75V, Case/Package=0603, ComponentLink1Description=https://datasheet.ciiva.com/11809/0900766b80eb1d8c-11809038.pdf?src-supplier=RSComponents, ComponentLink1URL=https://datasheet.ciiva.com/11809/0900766b80eb1d8c-11809038.pdf?src-supplier=RSComponents, ComponentLink2Description=https://datasheet.ciiva.com/5971/485442-5971798.pdf?src-supplier=Farnell, ComponentLink2URL=https://datasheet.ciiva.com/5971/485442-5971798.pdf?src-supplier=Farnell, ComponentLink3Description=https://datasheet.ciiva.com/24026/aoa0000ce26-32660-24026983.pdf?src-supplier=Mouser, ComponentLink3URL=https://datasheet.ciiva.com/24026/aoa0000ce26-32660-24026983.pdf?src-supplier=Mouser, ComponentLink4Description=https://datasheet.ciiva.com/46447/485442-46447114.pdf?src-supplier=Element14, ComponentLink4URL=https://datasheet.ciiva.com/46447/485442-46447114.pdf?src-supplier=Element14, ComponentLink5Description=https://datasheet.ciiva.com/43457/485442-43457243.pdf?src-supplier=Farnell, ComponentLink5URL=https://datasheet.ciiva.com/43457/485442-43457243.pdf?src-supplier=Farnell, ComponentLink6Description=https://datasheet.ciiva.com/46447/485442-46447115.pdf?src-supplier=Element14, ComponentLink6URL=https://datasheet.ciiva.com/46447/485442-46447115.pdf?src-supplier=Element14, ComponentLink7Description=https://datasheet.ciiva.com/41450/001180853-da-01-en-widerstand-era-0603-6k19-0-1-5000st-41450170.pdf?src-supplier=Conrad, ComponentLink7URL=https://datasheet.ciiva.com/41450/001180853-da-01-en-widerstand-era-0603-6k19-0-1-5000st-41450170.pdf?src-supplier=Conrad, Composition="Metal Film,Thin Film", Contact Plating=Tin, Depth=0.8mm, Features="Automotive AEC-Q200", Height=0.45mm, Lead Free="Lead Free", Length=1.6mm, Military Standard=Not, Mount="Surface Mount", Number of Pins=2, Number of Terminations=2, Packaging="Tape and Reel", Power Rating=100mW, Pricing 1="1=0,35000, 10=0,30000, 100=0,11720, 1000=0,04906, 2500=0,04498 (USD)", Radiation Hardening=No, REACH SVHC="No SVHC", RoHS=Yes, Stock 1=26110, Supplier 1=Digi-Key, Voltage Rating (DC)=75V, Width=0.8mm
R41: library part Res1, "Resistor", Case Code (Imperial)=0805, Case Code (Metric)=2012, Manufacturer 1=Panasonic, Manufacturer Part Number 1=ERA6AEB3402V, Max Operating Temperature=155°C, Max Power Dissipation=125mW, Min Operating Temperature=-55°C, Package Quantity=5000, Resistance=34kR, Supplier Part Number 1=P34KDACT-ND, Temperature Coefficient=25ppm/°C, Tolerance=0.1%, Voltage Rating=200V, Voltage Rating (DC)=100V, Case/Package=0805, ComponentLink1Description=https://datasheet.ciiva.com/11815/0900766b80eb1d8c-11815791.pdf?src-supplier=RSComponents, ComponentLink1URL=https://datasheet.ciiva.com/11815/0900766b80eb1d8c-11815791.pdf?src-supplier=RSComponents, ComponentLink2Description=https://datasheet.ciiva.com/41450/001181326-da-01-en-widerstand-era-0805-34k0-0-1-5000st-41450489.pdf?src-supplier=Conrad, ComponentLink2URL=https://datasheet.ciiva.com/41450/001181326-da-01-en-widerstand-era-0805-34k0-0-1-5000st-41450489.pdf?src-supplier=Conrad, ComponentLink3Description=https://datasheet.ciiva.com/9190/aoa0000ce26-9190487.pdf?src-supplier=Avnet, ComponentLink3URL=https://datasheet.ciiva.com/9190/aoa0000ce26-9190487.pdf?src-supplier=Avnet, ComponentLink4Description=https://datasheet.ciiva.com/17210/aoa0000ce26-17210191.pdf?src-supplier=Avnet+Europe, ComponentLink4URL=https://datasheet.ciiva.com/17210/aoa0000ce26-17210191.pdf?src-supplier=Avnet+Europe, ComponentLink5Description=https://datasheet.ciiva.com/22705/485442-22705221.pdf?src-supplier=Element14, ComponentLink5URL=https://datasheet.ciiva.com/22705/485442-22705221.pdf?src-supplier=Element14, ComponentLink6Description=https://datasheet.ciiva.com/6052/485442-6052790.pdf?src-supplier=Farnell, ComponentLink6URL=https://datasheet.ciiva.com/6052/485442-6052790.pdf?src-supplier=Farnell, ComponentLink7Description=https://datasheet.ciiva.com/7870/485442-7870667.pdf?src-supplier=Element14, ComponentLink7URL=https://datasheet.ciiva.com/7870/485442-7870667.pdf?src-supplier=Element14, ComponentLink8Description=https://datasheet.ciiva.com/7870/485442-7870668.pdf?src-supplier=Element14, ComponentLink8URL=https://datasheet.ciiva.com/7870/485442-7870668.pdf?src-supplier=Element14, Composition="Metal Film,Thin Film", Contact Plating=Tin, Depth=1.25mm, Features="Automotive AEC-Q200", Height=0.5mm, Lead Free="Lead Free", Length=2mm, Military Standard=Not, Mount="Surface Mount", Number of Pins=2, Number of Terminations=2, Packaging="Tape and Reel", Power Rating=125mW, Pricing 1="1=0,36000, 10=0,30200, 100=0,11820, 1000=0,04948, 2500=0,04536 (USD)", Radiation Hardening=No, REACH SVHC="No SVHC", RoHS=Yes, Stock 1=7057, Supplier 1=Digi-Key, Termination=SMD/SMT, Width=1.25mm
R42: library part Res1, "Resistor", Case Code (Imperial)=0805, Case Code (Metric)=2012, Manufacturer 1=Panasonic, Manufacturer Part Number 1=ERA-6AEB1181V, Max Operating Temperature=155°C, Max Power Dissipation=125mW, Min Operating Temperature=-55°C, Package Quantity=1, Resistance=1.18kR, Supplier Part Number 1=P1.18KDACT-ND, Temperature Coefficient=25ppm/°C, Tolerance=0.1%, Voltage Rating=100V, Case/Package=0805, ComponentLink1Description=https://datasheet.ciiva.com/11811/0900766b80eb1d8c-11811515.pdf?src-supplier=RSComponents, ComponentLink1URL=https://datasheet.ciiva.com/11811/0900766b80eb1d8c-11811515.pdf?src-supplier=RSComponents, ComponentLink2Description=https://datasheet.ciiva.com/26335/459360-da-01-en-widerstand-0805-era-26335818.pdf?src-supplier=Conrad, ComponentLink2URL=https://datasheet.ciiva.com/26335/459360-da-01-en-widerstand-0805-era-26335818.pdf?src-supplier=Conrad, ComponentLink3Description=https://datasheet.ciiva.com/7911/485442-7911589.pdf?src-supplier=Element14, ComponentLink3URL=https://datasheet.ciiva.com/7911/485442-7911589.pdf?src-supplier=Element14, ComponentLink4Description=https://datasheet.ciiva.com/7911/485442-7911590.pdf?src-supplier=Element14, ComponentLink4URL=https://datasheet.ciiva.com/7911/485442-7911590.pdf?src-supplier=Element14, ComponentLink5Description=https://datasheet.ciiva.com/5870/485442-5870600.pdf?src-supplier=Farnell, ComponentLink5URL=https://datasheet.ciiva.com/5870/485442-5870600.pdf?src-supplier=Farnell, ComponentLink6Description=https://datasheet.ciiva.com/5870/485442-5870601.pdf?src-supplier=Farnell, ComponentLink6URL=https://datasheet.ciiva.com/5870/485442-5870601.pdf?src-supplier=Farnell, ComponentLink7Description=https://datasheet.ciiva.com/9198/aoa0000ce26-9198586.pdf?src-supplier=Avnet, ComponentLink7URL=https://datasheet.ciiva.com/9198/aoa0000ce26-9198586.pdf?src-supplier=Avnet, ComponentLink8Description=https://datasheet.ciiva.com/5870/485442-5870603.pdf?src-supplier=Farnell, ComponentLink8URL=https://datasheet.ciiva.com/5870/485442-5870603.pdf?src-supplier=Farnell, Composition="Metal Film,Thin Film", Contact Plating=Tin, Depth=1.25mm, Features="Automotive AEC-Q200", Height=0.5mm, Lead Free="Lead Free", Length=2mm, Mount="Surface Mount", Number of Pins=2, Number of Terminations=2, Packaging="Tape and Reel", Power Rating=125mW, Pricing 1="1=0,36000, 10=0,30200, 100=0,11820, 1000=0,04948, 2500=0,04536 (USD)", Radiation Hardening=No, RoHS=Yes, Stock 1=9011, Supplier 1=Digi-Key, Termination=SMD/SMT, Voltage Rating (DC)=100V, Width=1.25mm
R43: library part Res1, "Resistor", Case Code (Imperial)=0805, Case Code (Metric)=2012, Manufacturer 1=Susumu, Manufacturer Part Number 1=RG2012P-4993-B-T5, Max Operating Temperature=155°C, Min Operating Temperature=-55°C, Power Rating=125mW, Resistance=499kR, Supplier Part Number 1=RG20P499KBCT-ND, Temperature Coefficient=25ppm/°C, Tolerance=0.1%, Voltage Rating=150V, Case/Package=0805, ComponentLink1Description=https://datasheet.ciiva.com/5624/rg-rm-rgh-datasheet-5624071.pdf?src-supplier=Mouser, ComponentLink1URL=https://datasheet.ciiva.com/5624/rg-rm-rgh-datasheet-5624071.pdf?src-supplier=Mouser, Composition="Thin Film", Height=0.4mm, Lead Free="Lead Free", Length=2mm, Packaging="Tape and Reel", Pricing 1="1=0,41000, 10=0,31800, 100=0,13360, 1000=0,07374, 2500=0,06913 (USD)", RoHS=Yes, Stock 1=27646, Supplier 1=Digi-Key, Termination=SMD/SMT, Voltage Rating (DC)=150V, Weight=0.000194oz, Width=1.2mm
R44 R45 R46 R47 R48 R49 R50 R51 R52 R53 R54 R55 R56 R57 Rpwr1 Rpwr2 Rsns1 Rsns2: library part Res1, "Resistor", LatestRevisionDate=17-Jul-2002, LatestRevisionNote="Re-released for DXP Platform.", PackageDescription="Axial Device, Thru-Hole; 2 Leads; 0.3 in Pin Spacing", PackageReference=AXIAL-0.3, Published=8-Jun-2000, Publisher="Altium Limited"
SW2: library part "DPST ESTOP"
U1 U2 U3 U4 U5 U6: "12-Bit Micro Power Digital-to-Analog Converter with an I2C-Compatible Interface and External Reference, 8-pin Mini SOIC, Pb-Free", Manufacturer="National Semiconductor", PackageTopMarking=XTT*X90C, PowerWise=Y, Code_JEDEC=MO-187-AA, ComponentLink1Description="DAC121C085 Datasheet", ComponentLink1URL=http://www.national.com/ds/DA/DAC121C085.pdf, ComponentLink2Description="DAC121C085 Web Page", ComponentLink2URL=http://www.national.com/pf/DA/DAC121C085.html, ComponentLink3Description="MUA08A Package Page", ComponentLink3URL=http://www.national.com/packaging/folders/mua08a.html, CompType="D/A Converter", DatasheetVersion=Mar-2008, PackageDescription="MINI SOIC, .118 x .118 x .034in, 8 Lead, .0256in Pitch", PackageReference=MUA08A, PackageVersion="revF, Apr-2008", PinCount=8, RevisionNote="Component URLs added", RoHS=Y
U7 U8: library part LM3914
U10: library part KUB4812QB-10A, "12V 10A DC DC step down", Case/Package=MSOP, Manufacturer 1="TI National Semiconductor", Max Operating Temperature=125°C, Max Supply Voltage=80V, Min Operating Temperature=-40°C, Min Supply Voltage=9V, Output Voltage=12V, Package Quantity=1000, Supplier Part Number 1=LM5069MM-2/NOPBCT-ND, ComponentLink1Description=https://datasheet.ciiva.com/15099/getdatasheetpartid-628880-15099677.pdf?src-supplier=Verical, ComponentLink1URL=https://datasheet.ciiva.com/15099/getdatasheetpartid-628880-15099677.pdf?src-supplier=Verical, ComponentLink2Description=https://datasheet.ciiva.com/3222/lm5069-3222438.pdf?src-supplier=Avnet, ComponentLink2URL=https://datasheet.ciiva.com/3222/lm5069-3222438.pdf?src-supplier=Avnet, ComponentLink3Description=https://datasheet.ciiva.com/3222/lm5069-3222470.pdf?src-supplier=Avnet, ComponentLink3URL=https://datasheet.ciiva.com/3222/lm5069-3222470.pdf?src-supplier=Avnet, ComponentLink4Description=https://datasheet.ciiva.com/6609/lm5069-6609670.pdf?src-supplier=Digi-Key, ComponentLink4URL=https://datasheet.ciiva.com/6609/lm5069-6609670.pdf?src-supplier=Digi-Key, ComponentLink5Description=https://datasheet.ciiva.com/1511/1642228-1511437.pdf?src-supplier=Element14, ComponentLink5URL=https://datasheet.ciiva.com/1511/1642228-1511437.pdf?src-supplier=Element14, Depth=3.1mm, Height=0.86mm, Lead Free="Lead Free", Length=3mm, Manufacturer Part Number 1=LM5069MM-2/NOPB, Mount="Surface Mount", Number of Channels=1, Number of Outputs=1, Number of Pins=10, Packaging="Tape and Reel", Pricing 1="1=3.00000, 10=2.69700, 25=2.54920, 100=2.09610, 250=1.88080, 500=1.81280 (USD)", Radiation Hardening=No, REACH SVHC="No SVHC", RoHS=Yes, Stock 1=115715, Supplier 1=Digi-Key, Width=3mm
U12: library part CMP-0069-02048-2, "3A SIMPLE SWITCHER® Power Module with 42V Maximum Input for High Voltage Output, 7-pin TO-PMOD, Pb-Free, 500 Reel", Manufacturer="Texas Instruments", PackageTopMarking=NSUZXYTTE#*LMZ14203*HTZ, PowerWise=Y, ComponentLink1Description="Datasheet URL", ComponentLink1URL=http://www.ti.com/general/docs/lit/getliterature.tsp?genericPartNumber=LMZ14203H&fileType=pdf, CompType=Switcher, PackageDescription="TO-PMOD-7, 10.16 x 9.85 x 4.57 mm Body, 7 Lead, 1.27mm Pitch, Surface Mount", PackageReference=NDW0007A, PinCount=7, RoHS=Y
VR1: "Voltage Regulator", LatestRevisionDate=29-May-2009, LatestRevisionNote="IPC-7351 Footprint Added.", PackageDescription="3-Pin Transistor Outline Package 2.54 mm Pitch, 15.1 mm Lead Span", PackageReference=D2PAK, Published=24-Mar-1999, Publisher="Altium Limited"
SW1: LatestRevisionDate=17-Jul-2002, LatestRevisionNote="Re-released for DXP Platform.", PackageDescription="Switch; 2 Leads", PackageReference=SPST-2, Published=24-Mar-1999, Publisher="Altium Limited"

## Via types
v1: diameter 3, hole 3, Top Layer to Bottom Layer, 4 vias
v2: diameter 1.4, hole 1.4, Top Layer to Bottom Layer, 4 vias

## Nets (pads, with @x,y where several pads share a name; then routed paths per layer and width w, separated by ;. In a path a pad name is that pad's centre, name@x,y a point inside that pad or via, vN(x,y) a via of type N, cw(c..) or ccw(c..) an arc to the next point about the centre after c; other vN are vias at no path point)
3.3V: J1.1 J1.2 J1.3
3V3: C53.1 C54.1 C55.2 C56.2 PS1.6 PS1.8 TP34.1
5V: ARD1.59 C4.2 C12.2 C20.2 C28.2 C36.2 C44.2 C62.1 C63.2 J1.7@328.74,195.825 J1.8 J1.9 J1.16 J1.22 J2.7@270.84,195 J2.8 J2.9 P2.2 P4.2 P6.2 P8.2 P10.2 P12.2 PS2.6 PS2.8 R1.2 R2.2 R3.2 R7.2 R11.2 R15.2 R19.2 R23.2 TP35.1 U1.6 U1.7 U2.6 U2.7 U3.6 U3.7 U4.6 U4.7 U5.6 U5.7 U6.6 U6.7
12V: C69.2 C70.2 C71.2 C72.2 C78.2 J1.13 J1.14 J1.15 J2.1 J2.2 J2.3 J2.13 J2.14 J2.15 PS3.6 PS3.8 TP36.1
12V_RELAY: C52.1 R48.1 R55.1 SW2.1 SW2.3 TP33.1 VR1.3
18.5VP: *1.9 B1.2 C49.2 C50.2 C57.2 C58.2 C59.2 C60.2 C61.2 C64.2 C65.2 C66.2 C67.2 C68.2 C83.1 DS1.1 DS2.1 DS3.1 DS4.1 DS5.1 DS6.1 DS7.1 DS8.1 DS9.1 DS10.1 DS11.1 DS12.1 DS13.1 DS14.1 DS15.1 DS16.1 DS17.1 DS18.1 DS19.1 DS20.1 P13.1 P13.2 PS1.2 PS2.2 Q3.3 R28.2 R35.2 R37.2 U7.3 U7.11 U8.3 U8.11
18.5VP_RAW: 1.2 *1.2 Cin1.2 K3.87a P15.1 P15.2 P15.3 P15.4 Q3.2 R45.1 R46.2 R47.2 Rsns1.1
18.5VP_XTRA_RAW: D9.1 K4.87a TH5.1 TH6.1
24V: C79.2 C80.1 P14.1 P14.2 R41.2 TP37.1 U12.7
37_VP: B2.2 C85.1 Q4.3 U10.9
37VP: C73.2 C74.2 C75.2 C76.2 C77.2 C82.1 F1.1 F2.1 F3.1 F4.1 F5.1 F6.1 PS3.2 R27.2 R39.2 R43.1 U12.1
37VP_RAW: 2.2 Cin2.2 K1.87a Q4.2 R52.1 R53.2 R54.2 Rsns2.1 U10.2
37VP_XTRA_RAW: D8.1 K2.30 TH1.1 TH2.1
"E1 Ch A": ESC1.12 P2.6
"E1 Ch A\": ESC1.14 P2.5
"E1 Ch B": ESC1.16 P2.8
"E1 Ch B\": ESC1.18 P2.7
"E1 H1": ESC1.13 P1.1
"E1 H2": ESC1.15 P1.2
"E1 H3": ESC1.17 P1.5
"E1 H Vcc": ESC1.11 P1.3
"E1 W1": C2.2 C3.2 L1.2 P1.7 TP2.1
"E1 W2": C5.2 C6.2 L2.2 P1.8 TP5.1
"E1 W3": C7.2 C8.2 L3.2 P1.4 TP6.1
"E2 Ch A": ESC2.12
"E2 Ch A\": ESC2.14
"E2 Ch B": ESC2.16
"E2 Ch B\": ESC2.18
"E2 H1": ESC2.13
"E2 H2": ESC2.15
"E2 H3": ESC2.17
"E2 H Vcc": ESC2.11
"E2 W1": C10.2 C11.2 L4.2 TP7.1
"E2 W2": C13.2 C14.2 L5.2 TP10.1
"E2 W3": C15.2 C16.2 L6.2 TP11.1
"E3 Ch A": ESC3.12
"E3 Ch A\": ESC3.14
"E3 Ch B": ESC3.16
"E3 Ch B\": ESC3.18
"E3 H1": ESC3.13
"E3 H2": ESC3.15
"E3 H3": ESC3.17
"E3 H Vcc": ESC3.11
"E3 W1": C18.2 C19.2 L7.2 TP12.1
"E3 W2": C21.2 C22.2 L8.2 TP15.1
"E3 W3": C23.2 C24.2 L9.2 TP16.1
"E4 Ch A": ESC4.12
"E4 Ch A\": ESC4.14
"E4 Ch B": ESC4.16
"E4 Ch B\": ESC4.18
"E4 H1": ESC4.13
"E4 H2": ESC4.15
"E4 H3": ESC4.17
"E4 H Vcc": ESC4.11
"E4 W1": C26.2 C27.2 L10.2 TP17.1
"E4 W2": C29.2 C30.2 L11.2 TP20.1
"E4 W3": C31.2 C32.2 L12.2 TP21.1
"E5 Ch A": ESC5.12
"E5 Ch A\": ESC5.14
"E5 Ch B": ESC5.16
"E5 Ch B\": ESC5.18
"E5 H1": ESC5.13
"E5 H2": ESC5.15
"E5 H3": ESC5.17
"E5 H Vcc": ESC5.11
"E5 W1": C34.2 C35.2 L13.2 TP22.1
"E5 W2": C37.2 C38.2 L14.2 TP25.1
"E5 W3": C39.2 C40.2 L15.2 TP26.1
"E6 Ch A": ESC6.12
"E6 Ch A\": ESC6.14
"E6 Ch B": ESC6.16
"E6 Ch B\": ESC6.18
"E6 H1": ESC6.13
"E6 H2": ESC6.15
"E6 H3": ESC6.17
"E6 H Vcc": ESC6.11
"E6 W1": C42.2 C43.2 L16.2 TP27.1
"E6 W2": C45.2 C46.2 L17.2 TP30.1
"E6 W3": C47.2 C48.2 L18.2 TP31.1
GND: 1.1 2.1 *1.5 ARD1.57 ARD1.58 ARD1.76 ARD1.78 ARD1.79 B1.1 B2.1 C1.2 C2.1 C4.1 C5.1 C7.1 C9.2 C10.1 C12.1 C13.1 C15.1 C17.2 C18.1 C20.1 C21.1 C23.1 C25.2 C26.1 C28.1 C29.1 C31.1 C33.2 C34.1 C36.1 C37.1 C39.1 C41.2 C42.1 C44.1 C45.1 C47.1 C49.1 C50.1 C51.2 C52.2 C53.2 C54.2 C55.1 C56.1 C57.1 C58.1 C59.1 C60.1 C61.1 C62.2 C63.1 C64.1 C65.1 C66.1 C67.1 C68.1 C69.1 C70.1 C71.1 C72.1 C73.1 C74.1 C75.1 C76.1 C77.1 C78.1 C80.2 C81.1 C82.2 C83.2 C84.1 C85.2 C86.1 Cin1.1 Cin2.1 D1.1 D2.1 D3.1 D4.1 D5.1 D6.1 D7.1 D10.1 D11.1 D12.1 ESC1.9 ESC1.10 ESC1.23 ESC1.26 ESC1.28 ESC2.9 ESC2.10 ESC2.23 ESC2.26 ESC2.28 ESC3.9 ESC3.10 ESC3.23 ESC3.26 ESC3.28 ESC4.9 ESC4.10 ESC4.23 ESC4.26 ESC4.28 ESC5.9 ESC5.10 ESC5.23 ESC5.26 ESC5.28 ESC6.9 ESC6.10 ESC6.23 ESC6.26 ESC6.28 J1.4 J1.6 J1.10 J1.12 J1.19 J2.4 J2.5 J2.6 J2.10 J2.12 J2.20 K1.85 K2.85 K3.85 K4.85 P1.6 P2.3 P3.6 P4.3 P5.6 P6.3 P7.6 P8.3 P9.6 P10.3 P11.6 P12.3 P13.3 P13.4 P14.3 P14.4 P15.5 P15.6 P15.7 P15.8 PS1.3 PS1.4 PS1.5 PS1.9 PS2.3 PS2.4 PS2.5 PS2.9 PS3.3 PS3.4 PS3.5 PS3.9 Q1.2 Q2.2 R4.1 R5.1 R6.1 R8.1 R9.1 R10.1 R12.1 R13.1 R14.1 R16.1 R17.1 R18.1 R20.1 R21.1 R22.1 R24.1 R25.1 R26.1 R29.1 R31.1 R32.1 R34.1 R36.1 R38.1 R40.1 R42.1 R49.1 R50.1 R56.1 R57.1 Rpwr1.1 Rpwr2.1 TH7.1 TH8.1 TH11.1 TH12.1 U1.5 U2.5 U3.5 U4.5 U5.5 U6.5 U7.2 U8.2 U10.5 U12.4 U12.8 VR1.2
Net*1_1: *1.1 R44.1 R45.2